# EAGLE board power-supply (EAGLE 9.1.0)
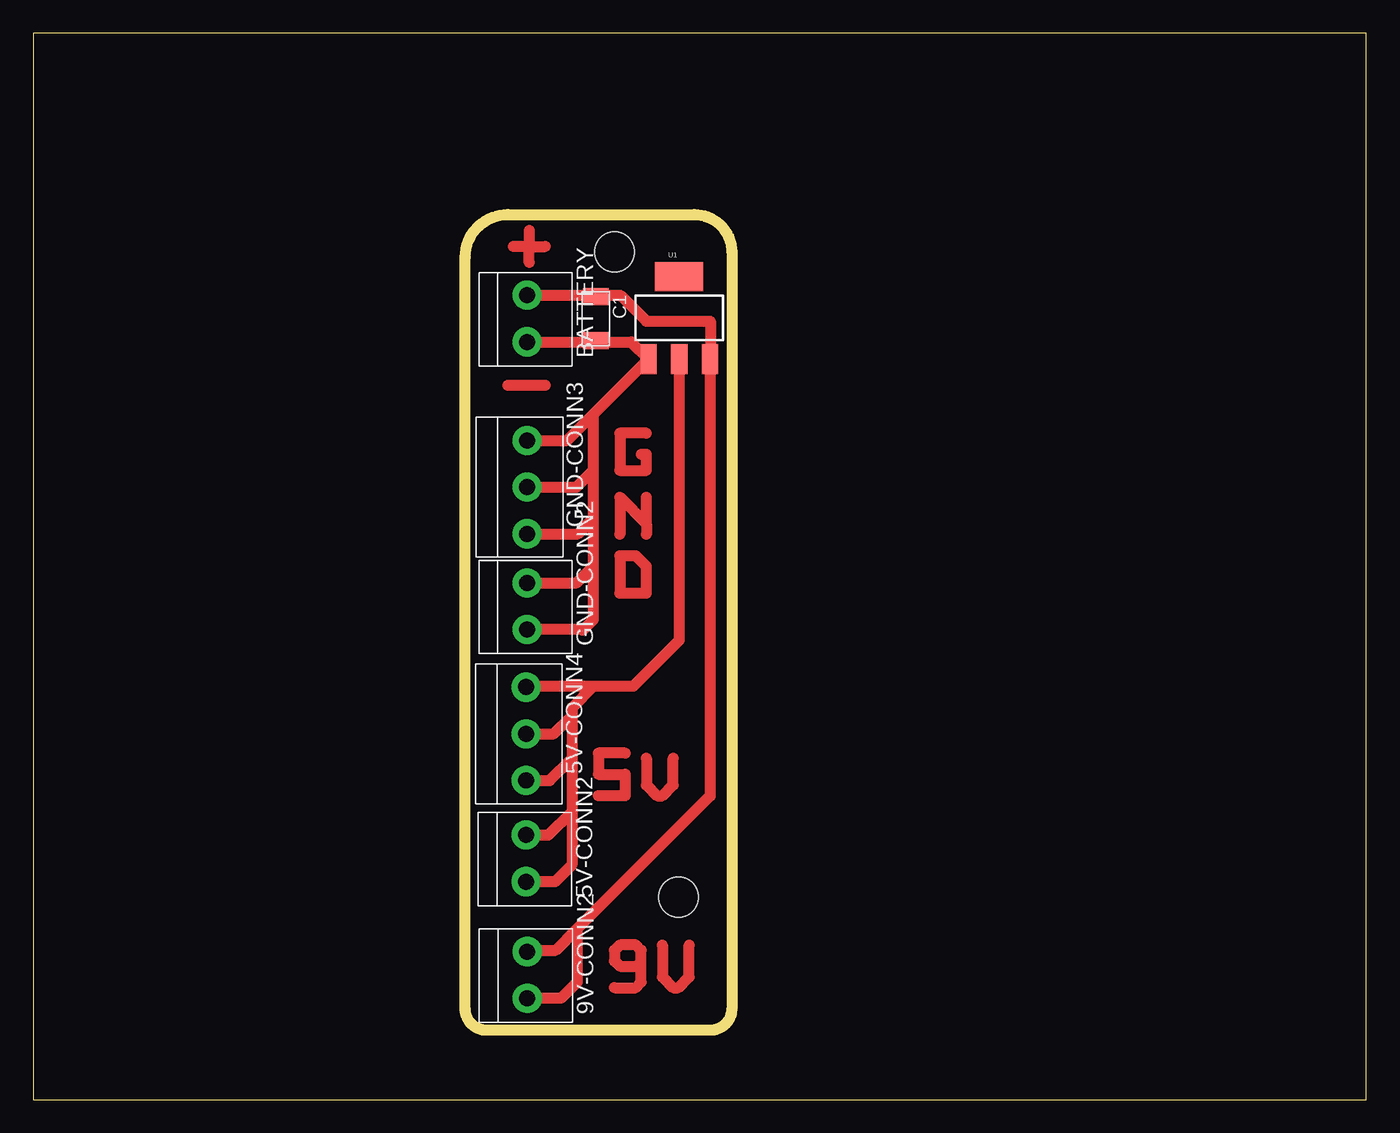
[diagram p0: board, top side]

Size 100 x 80 mm. Coordinates in mm from the lower left corner, seen from the top.
Outline: 0,0 100,0 100,80 0,80 0,0
Copper layers (1*16): Top 0.035mm / dielectric 1.5mm / Bottom 0.035mm
Design rules "default *": minimum track width 6mil, minimum drill 0.35mm, track to track 0.4mm, track to pad 0.4mm, pad to pad 0.4mm, via to via 0.4mm, smd to smd 6mil, copper to edge 40mil, drill to drill 6mil, minimum pad ring 10mil, minimum via ring 8mil, stop-mask expansion 4mil, vias tented up to drill 0mil, thermal gap 10mil
Holes 3 mm at 43.6,63.6 48.4,15.2
Milling: area 32.4,5.2 to 52.4,66.4

## Footprints (pad centres in the part's own frame; a part is rotated, then mirrored left to right if it is on the bottom)
ED555DS-2DS = drill 1.2 pad 2.184: 1 1.8,0; 2 -1.7,0
ED555DS-3DS = drill 1.2 pad 2.184: 1 -3.5,0; 2 0,0; 3 3.5,0
C1206FAB = smd 1.27 x 1.905: 1 -1.651,0; 2 1.651,0
SOT223 = smd 1.219 x 2.235: 1 -2.311,-3.099; 2 0,-3.099; 3 2.311,-3.099 | smd 3.6 x 2.2: 4 0,3.099

## Placement (x,y rotation side)
5V-CONN2  TERM-1X02-FABLAB  [ED555DS-2DS]  36.98,18.15 270 top
5V-CONN4  TERM-1X03'-FABLAB'  [ED555DS-3DS]  36.98,27.44 270 top
9V-CONN2  TERM-1X02-FABLAB  [ED555DS-2DS]  37.06,9.4 270 top
BATTERY  TERM-1X02-FABLAB  [ED555DS-2DS]  37.03,58.65 270 top
C1  100uf  [C1206FAB]  42.2,58.6 270 top
GND-CONN2  TERM-1X02-FABLAB  [ED555DS-2DS]  37.03,37.06 270 top
GND-CONN3  TERM-1X03'-FABLAB'  [ED555DS-3DS]  37.03,45.95 270 top
U1  [SOT223]  48.46,58.65 0 top

## Library data of the parts
5V-CONN2 5V-CONN4 9V-CONN2 BATTERY C1 GND-CONN2 GND-CONN3 = fab
U1 = fab; PROD_ID: VREG-08170

## Nets
5V: 5V-CONN2.1 5V-CONN2.2 5V-CONN4.1 5V-CONN4.2 5V-CONN4.3 U1.2
9V: 9V-CONN2.1 9V-CONN2.2 BATTERY.2 C1.1 U1.3
GND: BATTERY.1 C1.2 GND-CONN2.1 GND-CONN2.2 GND-CONN3.1 GND-CONN3.2 GND-CONN3.3 U1.1
N$10: U1.4

## Tracks (layer width: path | path; a pad name or v marks a point on that pad's centre or on a via)
5V
  Top 0.813: U1.2 48.46,34.46 45,31 42,31 | 42,31 37.04,31 5V-CONN4.1 | 42,31 40.4,29.4 40.4,28.8 | 40.4,28.8 40.4,25.6 | 40.4,25.6 40.4,21.6 | 40.4,21.6 40.4,17.6 39.15,16.35 5V-CONN2.1 | 5V-CONN2.2 38.65,19.85 40.4,21.6 | 5V-CONN4.3 38.74,23.94 40.4,25.6 | 5V-CONN4.2 39.04,27.44 40.4,28.8
9V
  Top 0.152: 44,60.4 43.85,60.25 C1.1 43.95,60.25 44.05,60.35
  Top 0.813: BATTERY.2 44.05,60.35 46,58.4 50.8,58.4 50.8,55.58 U1.3 50.77,22.77 40.8,12.8 | 40.8,12.8 40.8,8.8 39.6,7.6 9V-CONN2.1 | 9V-CONN2.2 37.16,11.2 39.2,11.2 40.8,12.8
GND
  Top 0.152: C1.2 42.3,56.95 42.4,56.85
  Top 0.813: BATTERY.1 42.4,56.85 44.85,56.85 U1.1 45.1,54.5 42,51.4 | GND-CONN2.1 41.14,35.26 41.2,35.2 42,36 42,40 | 42,51.4 42,47.2 | 42,47.2 42,43.6 | 42,43.6 42,40 | GND-CONN2.2 40.76,38.76 42,40 | GND-CONN3.3 40.85,42.45 42,43.6 | GND-CONN3.2 40.75,45.95 42,47.2 | GND-CONN3.1 40.05,49.45 42,51.4
N$1
  Top 0.813: 46,50 44,50 44,47.2 46,47.2 46,48.4 45.6,48.4
N$2
  Top 0.813: 44,42.4 44,45.2 46,43.2 | 46,43.2 46,42.4 | 46,43.2 46,45.2
N$3
  Top 0.813: 44,40.8 44,38 46,38 46,40 45.2,40.8 44,40.8
N$4
  Top 0.813: 44.4,26 42.4,26 42.4,24.4 44.4,24.4 44.4,22.8 42.4,22.8
N$5
  Top 0.813: 46,25.6 46,23.6 46.8,22.8 47.2,22.8 48,23.6 48,25.6
N$6
  Top 0.813: 35.6,53.6 38.4,53.6
N$7
  Top 0.813: 37.2,62.8 37.2,64 | 37.2,65.2 37.2,64 | 37.2,64 36,64 | 37.2,64 38.4,64
N$8
  Top 0.813: 43.6,8.4 45.2,8.4 45.6,8.8 45.6,11.2 45.2,11.6 44,11.6 43.6,11.2 43.6,10.4 44,10 45.2,10
N$9
  Top 0.813: 47.2,11.6 47.2,9.2 48,8.4 48.4,8.4 49.2,9.2 49.2,11.6